# Altium PCB XPCAM-C_1V4.PCBDOC (part 2 of 2)
Units mil, origin at the board's own origin, x right, y up, seen from the top; angles counter-clockwise.
Board outline 1696.85 x 1007.87 mil, 6 copper layers (Top Layer, Internal Plane 1, Mid-Layer 1, Internal Plane 2, Mid-Layer 2, Bottom Layer); 49 components, 33 nets, 261 pads, 143 vias.
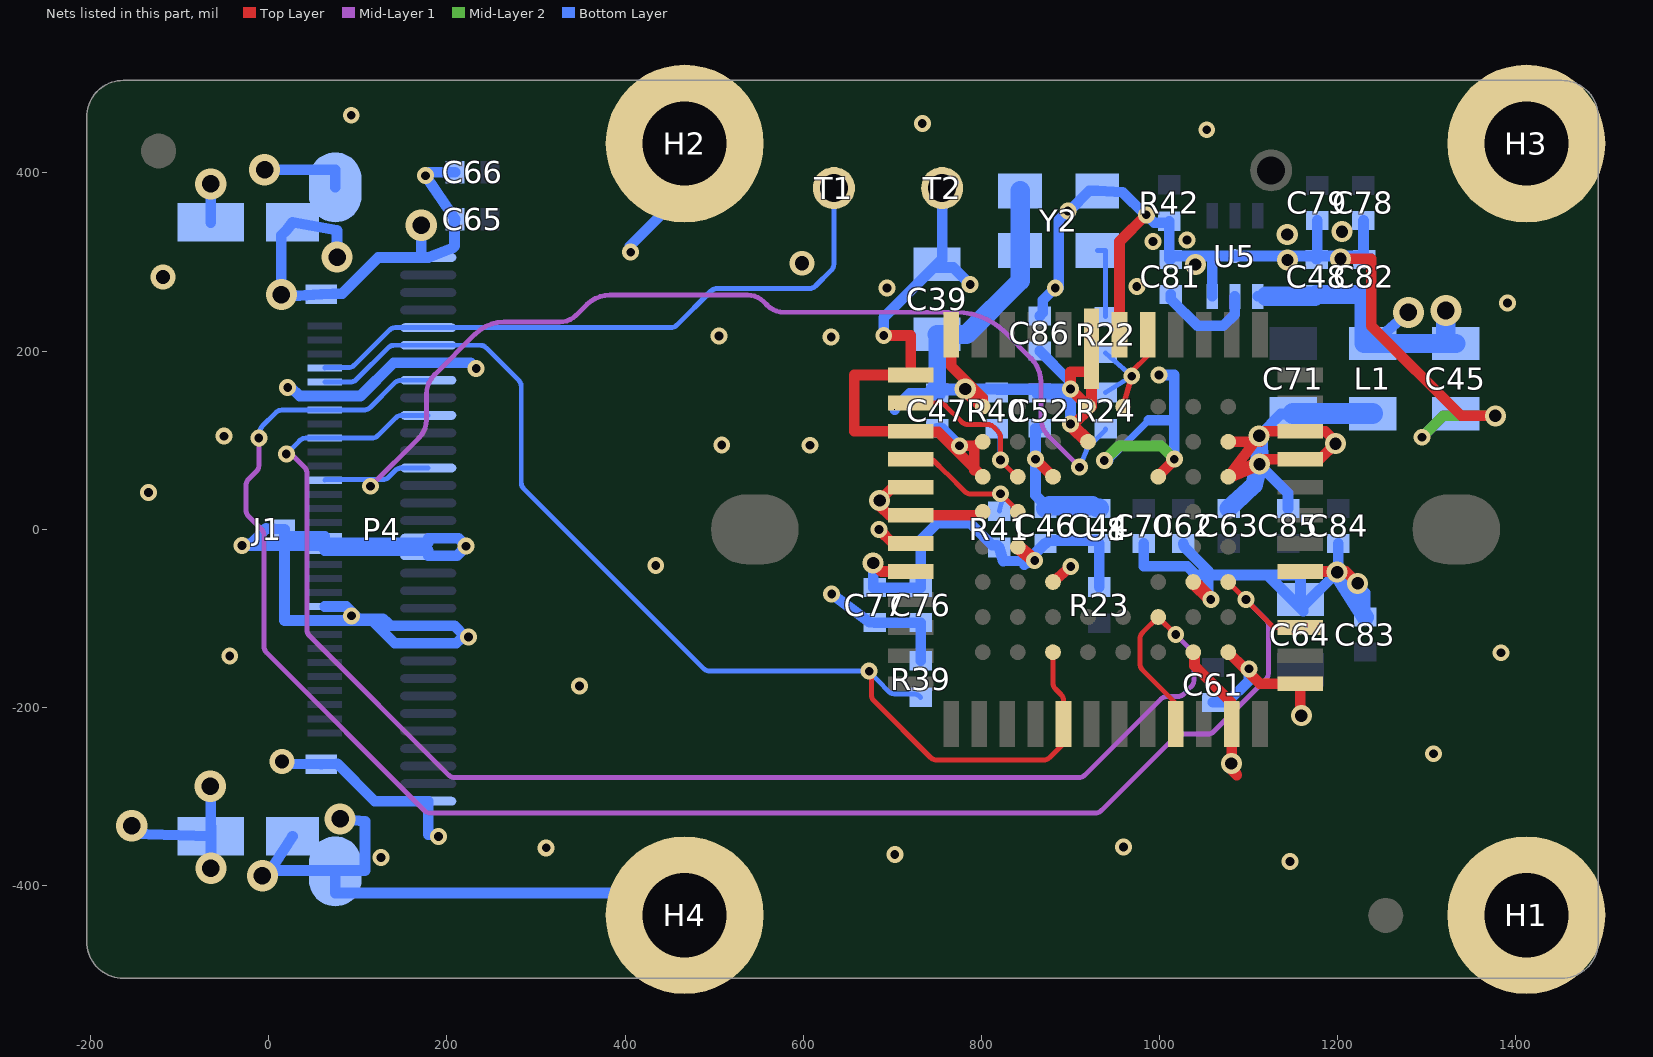
[diagram p6: the nets of this part, all layers, seen from the top]

## Via types
v1: diameter 19, hole 9.84, Top Layer to Bottom Layer, 101 vias
v2: diameter 23.62, hole 13.78, Top Layer to Bottom Layer, 22 vias
v3: diameter 35, hole 19.68, Top Layer to Bottom Layer, 12 vias
v4: diameter 16, hole 7.87, Top Layer to Bottom Layer, 3 vias
v5: diameter 27.95, hole 15.75, Top Layer to Bottom Layer, 3 vias
v6: diameter 20.47, hole 11.81, Top Layer to Bottom Layer, 1 vias
v7: diameter 0, hole 0, Top Layer to Bottom Layer, 1 vias

## Nets (pads, with @x,y where several pads share a name; then routed paths per layer and width w, separated by ;. In a path a pad name is that pad's centre, name@x,y a point inside that pad or via, vN(x,y) a via of type N, cw(c..) or ccw(c..) an arc to the next point about the centre after c; other vN are vias at no path point) (continued)
DGND: C39.1 C44.1 C45.1 C46.1 C47.1 C48.1 C52.1 C61.1 C65.1 C66.1 C76.2 C77.1 C78.1 C79.1 C81.1 C82.1 C86.1 H1.1 H2.1 H3.1 H4.1 J1.9 J1.10 J1.14 J1.15 J1.25 J1.33 J1.34 J1.35 J1.36 J1.37 J1.38 J1.39 P4.1 P4.7 P4.17 P4.18 P4.22 P4.23 P4.32 P4.33 P4.34 R39.2 R42.1 T2.1 U1.B1 U1.C1 U1.C3 U1.C6 U1.D1 U1.F3 U1.H7 U1.H8 U5.3 U5.7 U8.7 U8.9 U8.11 U8.12 U8.13 U8.29 U8.31 U8.48 Y2.2 | length 6791.9
  Top Layer w12: v1(685.13,-0.2) 700.67,-15.75 U8.13@720.88,-15.75 ; v1(690.42,217.58) 720.88,217.58 U8.7@720.88,173.23 657.21,173.23 657.21,110.24 U8.9@720.88,110.24 721.92,109.2 751.44,109.2 794.19,66.46 ; U8.11@720.88,47.24 719.08,45.45 698.86,45.45 v2(685.86,32.45) 686.66,31.66 686.66,25.69 696.6,15.75 U8.12@720.88,15.75 797.65,15.75 U1.D1@801.59,19.69 ; v1(775.45,93.79) 791.92,93.79 ; U1.C1@801.59,59.06 794.19,66.46 ; U1.B1@801.59,98.43 791.92,93.79 ; v1(860.64,78.74) U1.C3@880.33,59.06 ; U1.F3@880.33,-59.06 v1(900.31,-41.75) ; U8.48@955.13,218.5 955.13,323.05 v1(985.1,353.02) ; U1.C6@998.44,59.06 v1(1016.57,78.74) ; U1.H7@1037.81,-137.8 1039.26,-137.8 1039.26,-153.18 1080.48,-194.4 1080.48,-217.87 U8.29@1081.11,-218.5 1081.11,-270.06 1086.72,-275.66 v2(1080.5,-262.81) ; U1.H8@1077.18,-137.8 v1@1095.45,-156.06 ; v1(1100.42,-156.52) v1@1095.45,-156.06 ; v2(1159.16,-209.08) 1157.89,-209.08 U8.31@1157.89,-173.23 1112.61,-173.23 v1@1095.45,-156.06 ; v2(1203.2,303.7) 1237.61,303.7 1237.61,228.33 1338.49,127.45 v2(1376.89,127.45) ; 791.92,93.79 791.92,66.46 794.19,66.46
  Mid-Layer 2 w12: v1(938.02,77.19) 954.42,93.59 1001.72,93.59 v1(1016.57,78.74) ; v1(1294.45,103.39) 1318.52,127.45 v2(1376.89,127.45)
  Bottom Layer w7.87: v1@942.52,77.19 987.72,122.39
  Bottom Layer w12: v3(-153.68,-332.62) -153.68,-341.6 J1.36@-64.96,-344.49 ; v3(-65.44,-288.41) -64.96,-293.69 J1.36@-64.96,-344.49 ; J1.35@-64.96,344.49 v3(-64.96,387.69) ; v3(-64.79,-380.42) -64.79,-333.95 J1.36@-64.96,-344.49 ; v3(-4.6,403.56) 74.8,403.56 P4.33@74.8,383.86 ; v5(15.14,-260.68) 17.38,-262.91 J1.37@59.06,-263.78 77.03,-262.91 119.24,-305.12 P4.32@179.13,-305.12 179.13,-342.47 188.34,-342.47 v1(190.52,-344.65) ; v1(21.33,159.16) 24.73,159.16 34.9,149.74 ; J1.33@26.77,-344.49 6.79,-375.57 v3(-6.92,-388.81) -1.11,-382.99 108.15,-382.99 ; J1.10@62.99,-86.61 87.07,-86.61 v1@101.02,-100.57 ; J1.15@62.99,-7.87 17.72,-7.87 17.72,-102.36 ; J1.25@62.99,149.61 62.86,149.74 34.9,149.74 ; v3(76.77,305.55) 76.77,335.51 J1.34@26.77,344.49 19.8,335.51 14.29,330.01 v3(14.29,263.5) 14.48,261.28 19.93,261.28 J1.38@59.06,263.78 82.56,264.65 123.03,305.12 P4.1@171.32,305.12 ; v3(80.14,-325.04) 108.15,-327.73 108.15,-382.99 ; v3(171.32,341.3) P4.1@171.32,305.12 ; C66.1@209.27,400.96 180.14,400.96 v1(176.19,397.02) C65.1@209.27,348.23 208.58,347.54 208.58,318.04 206.36,315.82 P4.1@179.13,305.12 P4.1@171.32,305.12 ; v1(232.99,180.52) 226.5,187.01 P4.7@179.13,187.01 140.3,187.01 103.03,149.74 34.9,149.74 ; v1@405.28,317.89 481.09,393.7 H2.1@466.94,433.07 ; H4.1@466.94,-433.07 506.31,-387.59 502.58,-408.24 74.8,-408.24 P4.34@74.8,-383.86 80.9,-382.99 108.15,-382.99 ; v1(631.94,-72.55) 674.42,-104.2 C77.1@680.46,-104.78 C76.2@731.88,-104.78 R39.2@731.88,-147.63 ; v1(690.42,217.58) 690.42,237.73 C39.1@746.51,293.82 ; C47.1@750.25,113.51 755.72,113.51 v1(775.45,93.79) ; T2.1@755.95,383.03 755.95,302.56 755.25,302.56 C39.1@750.25,297.56 C39.1@746.51,293.82 ; v1(787.4,274.9) 768.48,293.82 C39.1@746.51,293.82 ; C52.1@865.38,113.51 860.64,113.51 v1(860.64,78.74) 860.64,38.19 876.48,22.34 C46.1@871.95,23.55 ; C86.1@865.38,239.56 869,243.18 869,257.16 v1(882.89,271.05) 886.93,271.05 886.93,347.3 v1(897.02,357.39) 898.67,357.39 921.2,379.92 Y2.2@930.12,379.92 958.49,378.48 983.95,353.02 v1(985.1,353.02) 993.88,344.24 1009.26,344.24 R42.1@1010.86,345.84 C81.1@1010.86,308.36 ; v1(938.02,77.19) v1@942.52,77.19 ; 987.72,122.39 1016.57,122.39 ; v1(999.3,173.25) 1016.57,173.25 1016.57,122.39 ; C81.1@1012.72,303.02 1010.86,303.02 C81.1@1010.86,308.36 ; v1(1016.57,78.74) 1016.57,122.39 ; U5.3@1059.05,261.49 1059.05,306.77 U5.7@1084.64,306.77 ; C61.1@1059.99,-194.21 1076.05,-194.21 1100.42,-169.84 v1(1100.42,-156.52) ; C48.1@1176.24,303.02 1177.06,303.85 C79.1@1177.06,346.63 ; C78.1@1228.82,346.63 1228.82,303.85 C82.1@1229.64,303.02 1225.9,306.77 U5.7@1084.64,306.77 ; v1(1294.45,103.39) 1318.66,127.59 1330.03,127.59 C45.1@1332.36,129.92 ; 17.72,-102.36 J1.9@62.99,-102.36 130.08,-102.36 ; 17.72,-102.36 J1.39@17.72,0 17.67,0 -2.87,0.87 -18.72,-14.98 v1(-29.99,-18.14) 59.16,-18.14 J1.14@62.99,-23.62 ; J1.14@62.99,-23.62 62.99,-15.01 179.13,-15.01 P4.17@179.13,-9.84 213.08,-9.84 221.62,-18.39 v1(221.62,-18.88) 221.62,-19.25 211.35,-29.53 P4.18@179.13,-29.53 179.13,-23.62 J1.14@62.99,-23.62 ; v1@101.02,-100.57 128.28,-100.57 130.08,-102.36 ; v1@101.02,-100.57 101.95,-101.49 115.13,-101.49 141.58,-127.95 P4.23@179.13,-127.95 210.65,-127.95 215.85,-122.74 223.01,-122.74 223.04,-120.79 v1(224.39,-120.81) 222.39,-118.81 220.74,-120.47 208.54,-108.27 P4.22@179.13,-108.27 137.21,-108.27 132.56,-103.62 131.33,-103.62 130.08,-102.36 ; C81.1@1010.86,308.36 1012.46,306.77 U5.7@1084.64,306.77
  Bottom Layer w21.65: C46.1@871.95,23.55 876.48,26.34 924.58,26.34 C44.1@932.28,23.55
  other v1: 1146.48,-372.76 125.97,-368.28 702.81,-364.95 311.5,-357.48 959.51,-356.59 1307.59,-251.84 348.8,-175.96 -43.65,-142.14 1383.15,-138.52 92.91,-97.05 434.51,-40.44 -134.95,41.51 607.63,94.45 508.61,94.69 -50.11,104.61 631.37,216.04 505.55,216.93 1390.48,253.94 694.03,270.86 974.49,272.55 406.35,311.13 992.54,323.2 1030.71,324.79 1052.96,448.53 733.7,455.51 92.73,464.82
  other v2: 1040.19,297.39 1143.66,302.34 1143.32,330.92 1204.72,334.14
  other v5: -118.36,283.35 598.81,298.67
EXPOSURE: J1.26 P4.6 R39.1 U1.H3 U8.23 | length 1335.1
  Top Layer w5.5: v1(674.05,-159.2) v1@675.32,-160.11 ; U1.H3@880.33,-137.8 880.33,-172.37 ccw(c889.95,-172.37) 883.15,-179.17 889.32,-185.34 cw(c882.51,-192.15) 892.14,-192.15 U8.23@892.14,-218.5 U8.23@892.14,-236.63 ; v1@675.32,-160.11 cw(c669.7,-167.92) v1@676.51,-161.12 ; v1@675.32,-160.11 cw(c669.7,-167.92) v1@676.51,-161.12 ; v1@676.51,-161.12 676.65,-161.26 676.65,-185.78 ; 676.65,-185.78 ccw(c686.28,-185.78) 679.47,-192.58 ; 676.65,-185.78 ccw(c686.28,-185.78) 679.47,-192.58 ; 679.47,-192.58 742.91,-256.01 ; 742.91,-256.02 ccw(c749.71,-249.21) 749.71,-258.83 ; 742.91,-256.02 ccw(c749.71,-249.21) 749.71,-258.83 ; 749.71,-258.83 869.94,-258.83 ; 869.94,-258.83 ccw(c869.94,-249.21) 876.74,-256.02 ; 869.94,-258.83 ccw(c869.94,-249.21) 876.74,-256.02 ; 876.74,-256.01 U8.23@889.32,-243.44 ; U8.23@889.32,-243.44 ccw(c882.51,-236.63) U8.23@892.14,-236.63 ; U8.23@889.32,-243.44 ccw(c882.51,-236.63) U8.23@892.14,-236.63
  Bottom Layer w5.5: J1.26@62.99,165.35 63.7,165.37 cw(c63.95,155.75) 63.95,165.38 91.69,165.38 ccw(c91.69,175) 98.5,168.19 134.18,203.88 cw(c140.99,197.07) 140.99,206.7 P4.6@179.13,206.69 237.26,206.7 cw(c237.26,197.07) 244.06,203.88 280.7,167.25 cw(c273.89,160.44) 283.51,160.44 283.51,52.51 ccw(c293.14,52.51) 286.33,45.7 488.41,-156.38 ccw(c495.22,-149.57) 495.22,-159.2 v1(674.05,-159.2) 695.43,-181.68 ccw(c702.41,-175.04) 702.41,-184.67 723.99,-184.67 cw(c723.99,-194.29) 730.8,-187.49 R39.1@731.88,-188.58
LEDOUT0: J1.22 P4.10 U1.G6 U8.27 | length 1728.3
  Top Layer w5.5: U1.G6@998.44,-98.43 980.75,-116.11 ccw(c987.56,-122.91) 977.94,-122.91 977.94,-150.87 ccw(c987.56,-150.87) 980.75,-157.68 1015.3,-192.23 cw(c1008.5,-199.04) 1018.12,-199.04 U8.27@1018.12,-218.5
  Top Layer w6: U1.G6@998.44,-98.43 v1(1018.12,-118.11)
  Mid-Layer 1 w5.5: v1(19.83,84.56) 21.43,84.56 cw(c21.43,74.94) 28.24,81.74 40.31,69.67 cw(c33.5,62.87) 43.12,62.87 43.12,-112.92 ccw(c52.75,-112.92) 45.94,-119.73 202.1,-275.88 ccw(c208.9,-269.08) 208.9,-278.7 909.17,-278.7 ccw(c909.17,-269.08) 915.97,-275.88 1001.36,-190.5 cw(c1008.16,-197.31) 1008.16,-187.68 1020.28,-187.68 ccw(c1020.28,-178.06) 1027.09,-184.86 1035.67,-176.28 ccw(c1028.87,-169.47) 1038.49,-169.47 1038.49,-142.47 ccw(c1028.87,-142.47) 1035.68,-135.66 v1(1018.12,-118.11)
  Bottom Layer w5.5: v1(19.83,84.56) 34.81,99.54 cw(c41.62,92.74) 41.62,102.36 J1.22@62.99,102.36 115.78,102.36 ccw(c115.78,111.99) 122.58,105.18 142.54,125.14 cw(c149.34,118.33) 149.34,127.95 P4.10@179.13,127.95
MCLK27M: R22.1 R24.1 U1.A5 U8.47 | length 163.2
  Top Layer w5.5: v1(968.78,171.97) 968.78,177.16 986.63,195.01 U8.47@986.63,218.5
  Top Layer w6: U1.A5@959.07,137.8 v1(968.78,171.97)
  Bottom Layer w5.5: R24.1@939.38,153.67 v1(968.78,171.97) R22.1@939.38,197.74
MCLK27M': J1.19 P4.13 R24.2 | length 1492.4
  Mid-Layer 1 w5.5: v1(114.36,48.39) 168.98,103.01 ; v1(910.19,69.82) 875.41,104.61 ; 168.98,103.01 ccw(c149.38,122.61) 177.1,122.61 ; 168.98,103.01 ccw(c149.38,122.61) 177.1,122.61 ; 177.1,122.61 177.1,151.36 ; 177.1,151.36 cw(c208.64,151.36) 186.34,173.66 ; 177.1,151.36 cw(c208.64,151.36) 186.34,173.66 ; 186.34,173.66 232.12,219.44 ; 232.12,219.44 cw(c264.03,187.53) 264.03,232.66 ; 232.12,219.44 cw(c264.03,187.53) 264.03,232.66 ; 264.03,232.66 326.57,232.66 ; 326.57,232.66 ccw(c326.57,259.17) 345.32,240.42 ; 326.57,232.66 ccw(c326.57,259.17) 345.32,240.42 ; 345.32,240.42 357.1,252.2 ; 357.1,252.2 cw(c383.13,226.18) 383.13,262.98 ; 357.1,252.2 cw(c383.13,226.18) 383.13,262.98 ; 383.13,262.98 537.67,262.98 ; 537.67,262.98 cw(c537.67,237.5) 555.68,255.52 ; 537.67,262.98 cw(c537.67,237.5) 555.68,255.52 ; 555.68,255.52 559.95,251.25 ; 559.95,251.25 ccw(c578.3,269.59) 578.3,243.65 ; 559.95,251.25 ccw(c578.3,269.59) 578.3,243.65 ; 578.3,243.65 771.66,243.65 ; 771.66,243.65 cw(c771.66,165.16) 827.16,220.66 ; 771.66,243.65 cw(c771.66,165.16) 827.16,220.66 ; 827.16,220.66 855.58,192.25 ; 855.58,192.25 cw(c828.08,164.75) 866.97,164.75 ; 855.58,192.25 cw(c828.08,164.75) 866.97,164.75 ; 866.97,124.99 ccw(c895.78,124.99) 875.41,104.61 ; 866.97,124.99 ccw(c895.78,124.99) 875.41,104.61 ; 866.97,124.99 866.97,164.75
  Bottom Layer w5.5: J1.19@62.99,55.12 63.86,55.99 v1@114.36,55.99 ; v1(114.36,48.39) v1@114.36,55.99 ; P4.13@179.13,68.9 149.09,68.9 ccw(c149.09,59.27) 142.28,66.08 135.01,58.8 cw(c128.2,65.61) 128.2,55.99 v1@114.36,55.99 ; v1(910.19,69.82) 918.07,89.39 ; R24.2@939.38,112.73 939.38,111.79 920.19,92.6 ; 918.07,89.39 cw(c927,85.79) 920.2,92.6 ; 918.07,89.39 cw(c927,85.79) 920.2,92.6
NETC81_2: C81.2 U5.2 | length 115.3
  Bottom Layer w11.81: C81.2@1012.72,263.65 1012.76,263.61 1012.76,258.14 1042.57,228.33 1071.68,228.33 1084.64,241.29 U5.2@1084.64,261.49
NETR22_2: R22.2 Y2.3 | length 83.6
  Bottom Layer w5.5: Y2.3@930.12,312.99 939.38,312.99 R22.2@939.38,238.68
NETR40_1: R40.1 U1.C2 U8.8 | length 206.6
  Top Layer w5.5: U8.8@720.88,141.73 752.71,141.73 cw(c752.71,132.11) 759.52,138.91 777.82,120.61 ccw(c784.63,127.42) 784.63,117.79 806.83,117.79 cw(c806.83,108.17) 813.63,114.97 818.59,110.02 cw(c811.78,103.21) 821.41,103.21 821.41,80.04 v1(821.41,77.83) 821.13,77.55 839.63,59.06 U1.C2@840.96,59.06
  Bottom Layer w5.5: R40.1@817.28,112.73 820.98,105.33 820.98,77.83 v1(821.41,77.83)
NETR41_1: R41.1 U1.D2 U8.10 | length 167.4
  Top Layer w5.5: U8.10@720.88,78.74 744.84,78.74 745.73,77.86 760.58,63 760.91,63 781.38,42.53 ccw(c788.19,49.33) 788.19,39.71 821.18,39.71 v1(821.43,39.96) 821.69,39.96 822.21,39.44 840.96,20.69 U1.D2@840.96,19.69
  Bottom Layer w5.5: R41.1@820.15,20.52 824.68,37 823.76,37.76 822.71,40.38 v1(821.43,39.96)
STANDBY: J1.24 P4.8 U1.F8 U8.33 | length 1934.8
  Top Layer w5.5: U1.F8@1077.18,-59.06 v1(1096.86,-78.74) 1127.93,-109.81 1127.93,-110.24 U8.33@1157.89,-110.24
  Mid-Layer 1 w5.5: v1(-11,102.41) -11,71.74 cw(c-20.62,71.74) -13.82,64.94 -22.56,56.2 ccw(c-15.75,49.39) -25.38,49.39 -25.38,21.57 ccw(c-15.75,21.57) -22.56,14.77 -7.96,0.17 cw(c-14.76,-6.64) -5.14,-6.64 -5.14,-131.64 ccw(c4.49,-131.64) -2.32,-138.45 174.95,-315.72 ccw(c181.76,-308.91) 181.76,-318.54 927.64,-318.54 ccw(c927.64,-308.91) 934.45,-315.72 1017.59,-232.58 cw(c1024.39,-239.39) 1024.39,-229.76 1054.13,-229.76 ccw(c1054.13,-220.14) 1060.94,-226.94 1119.31,-168.57 ccw(c1112.5,-161.76) 1122.13,-161.76 1122.13,-107.99 ccw(c1112.5,-107.99) 1119.31,-101.18 v1(1096.86,-78.74)
  Bottom Layer w5.5: v1(-11,102.41) -9.65,103.76 -9.65,109.38 cw(c-0.02,109.38) -6.83,116.18 8.03,131.04 cw(c14.84,124.23) 14.84,133.86 J1.24@62.99,133.86 106.94,133.86 ccw(c106.94,143.48) 113.74,136.68 141.57,164.51 cw(c148.38,157.7) 148.38,167.32 P4.8@179.13,167.33
TEST1: J1.27 P4.5 T1.1 | length 704.9
  Bottom Layer w5.5: J1.27@62.99,181.1 63.42,181.53 89.44,181.53 ccw(c89.44,191.15) 96.24,184.35 125.34,213.45 135.45,223.56 cw(c142.26,216.76) 142.26,226.38 P4.5@179.13,226.38 451.45,226.38 ccw(c451.45,236.01) 458.26,229.2 496.54,267.48 cw(c503.34,260.67) 503.34,270.3 607.06,270.3 ccw(c607.06,279.92) 613.87,273.12 631.63,290.87 ccw(c624.82,297.68) 634.44,297.68 T1.1@634.44,383.03
VAA3.3V: C62.2 C63.2 C64.2 C70.2 C71.2 C83.2 C84.2 C85.2 L1.2 U1.B8 U1.C8 U1.F7 U8.35 U8.39 U8.40 | length 1370.3
  Top Layer w12: U1.C8@1077.18,59.06 v2(1111.75,104.98) ; U1.B8@1077.18,98.43 v2@1113.33,98.43 ; v2@1103.82,70.3 v2(1112.17,73.14) ; v2@1113.33,79.04 1112.17,77.88 v2(1112.17,73.14) ; v2@1113.33,109.73 1113.84,110.24 U8.40@1157.89,110.24 1185.93,110.24 1197.35,98.81 v2(1197.35,96.2) 1179.89,78.74 U8.39@1157.89,78.74 1117.77,78.74 v2(1112.17,73.14) ; U8.35@1157.89,-47.24 v2@1196.71,-47.24 ; v2(1199.39,-47.99) v2@1196.71,-47.24 ; v2(1222.41,-60.55) 1209.11,-47.24 v2@1196.71,-47.24
  Top Layer w15.75: U1.F7@1037.81,-59.06 v1(1057.49,-78.74) ; U1.C8@1077.18,59.06 v2@1103.82,70.3
  Bottom Layer w12: C70.2@982.27,-15.86 982.27,-41.52 1031.01,-41.52 1040.74,-51.25 1054.45,-51.25 ; C62.2@1026.67,-15.86 1027.61,-19.69 1054.45,-46.52 1054.45,-51.25 ; v1(1057.49,-78.74) 1054.45,-75.7 1054.45,-51.25 ; v2(1111.75,104.98) 1136.14,129.38 1154.07,129.38 C71.2@1150.01,129.92 ; v2(1112.17,73.14) 1112.17,72.52 1144.2,40.49 C85.2@1144.2,23.51 ; C84.2@1200.69,-15.86 1200.69,-46.69 v2(1199.39,-47.99) 1161.3,-86.08 C64.2@1161.3,-91.1 ; v2(1222.41,-60.55) 1222.41,-62.58 1230.87,-71.04 C83.2@1230.87,-98.43 ; 1054.45,-51.25 1120.89,-51.25 ; 1120.89,-51.25 1121.45,-51.25 ; 1120.89,-51.25 1161.3,-91.66 C64.2@1158.14,-78.74 ; 1121.45,-51.25 C64.2@1161.3,-91.1 ; 1121.45,-51.25 1158.14,-51.25 C64.2@1158.14,-78.74 ; C64.2@1158.14,-78.74 1161.3,-92.03 C64.2@1161.3,-91.1
  Bottom Layer w19.68: v2(1111.75,104.98) v2(1112.17,73.14) ; v2(1199.39,-47.99) C83.2@1230.87,-98.43
  Bottom Layer w20: C63.2@1077.5,23.51 1083.79,29.2 1105.88,49.68 v2(1112.17,73.14)
  Bottom Layer w23.62: C71.2@1150.01,129.92 L1.2@1239.21,129.92
VDD3.3V: C39.2 C44.2 C45.2 C46.2 C47.2 C48.2 C52.2 C76.1 C77.2 C82.2 C86.2 L1.1 R23.2 R40.2 R41.2 U1.A1 U1.A4 U1.B4 U1.E2 U5.1 U8.1 U8.6 U8.14 Y2.1 Y2.4 | length 1975.6
  Top Layer w12: v2(678.55,-37.87) 687.88,-47.2 U8.14@720.88,-47.24 U8.14@720.88,-47.24 ; U8.6@766.15,218.5 766.15,183.16 801.48,147.83 801.48,137.9 U1.A1@801.59,137.8 ; v1@901.87,116.25 923.63,138.02 U8.1@923.63,176.94 ; U1.A4@919.7,137.8 v1(900.01,157.48) 900.01,176.94 U8.1@923.63,176.94 ; U8.1@923.63,202.76 U8.1@923.63,176.94
  Top Layer w15.75: v2(781.9,157.48) U1.A1@801.59,137.8 ; U1.E2@840.96,-19.69 v1(859.85,-34.85) ; v1(900.01,118.11) 901.87,116.25 U1.B4@919.7,98.43
  Bottom Layer w5.5: C47.2@750.25,152.88 777.31,152.89 v2(781.9,157.48) ; R40.2@817.28,153.67 860.9,153.67 C52.2@865.38,152.88 865.38,157.48 v1@898.62,157.48 ; v1@898.62,157.48 v1(900.01,157.48) 899.45,158.31 v1@898.62,157.48
  Bottom Layer w12: v2(678.55,-37.87) 678.55,-65.41 C77.2@680.46,-65.42 C76.1@731.88,-65.42 731.88,-11.91 750.58,6.78 787.59,6.78 812.17,-17.79 817.52,-17.79 R41.2@820.15,-20.42 824.68,-35.96 v1(859.85,-34.85) 847.96,-39.37 871.51,-15.82 C46.2@871.95,-15.82 876.48,-12.53 928.61,-12.48 C44.2@932.28,-15.82 R23.2@932.28,-64.63 ; v7(702.63,134.63) 702.63,135.32 719.71,152.4 C47.2@750.25,152.88 743.28,156.59 743.28,157.48 v2(781.9,157.48) 898.62,157.48 898.62,166.95 C86.2@865.38,200.19 ; C52.2@865.38,152.88 862.87,151.7 900.01,151.7 v1(900.01,118.11) ; U5.1@1110.24,261.49 1119.76,261.49 ; L1.1@1239.21,208.66 v3(1279.32,243.44)
  Bottom Layer w19.68: C47.2@750.25,152.88 C39.2@750.25,218.82
  Bottom Layer w21.65: C39.2@750.25,218.82 783.17,218.82 843.51,279.16 Y2.4@843.51,312.99 Y2.1@843.51,379.92 ; 1119.76,261.49 1174.07,261.49 C48.2@1176.24,263.65 C82.2@1229.64,263.65 1229.64,208.66 L1.1@1239.21,208.66 C45.2@1332.36,208.66 1321.36,208.66 v3(1321.36,245.65)
pads on no net: J1.31 J1.32 LM1.1 LM1.2 M1.1 M2.1 U1.A2 U1.A3 U1.A6 U1.B2 U1.B3 U1.B6 U1.D7 U1.D8 U1.E7 U1.E8 U1.G3 U1.G5 U1.H5 U5.5 U8.2 U8.3 U8.4 U8.5 U8.22 U8.26 U8.36 U8.37 U8.44 U8.45

## Polygon pours and split planes (outlines as drawn)
VDD3.3V on Bottom Layer "Bottom Layer-VDD3.3V" (solid, remove dead copper, pour order 1000): 950.93,-0.62 797.63,-0.62 778.4,18.61 723.91,18.61 663.29,-42.01 663.29,-88.22 950.93,-88.22
AGND on Bottom Layer "Bottom Layer-AGND" (solid, remove dead copper, pour order 1001): 1289.87,91.77 1289.87,-183.72 1115.44,-183.72 1115.44,-93.15 950.23,-93.15 950.23,47.74 994.26,91.77 1066.8,91.77 1066.8,20.07 1139.76,20.07 1211.46,91.77
VAA3.3V on Bottom Layer "Bottom Layer-VAA3.3V" (solid, remove dead copper, pour order 1002): 956.88,1.05 1034.87,1.05 1059.97,-24.06 1154.52,-24.06 1155.15,-23.43 1222.41,-23.43 1222.41,-114.87 1064.25,-114.87 1011.1,-61.72 956.88,-61.72
5V0 on Bottom Layer "Bottom Layer-5V0" (solid, remove dead copper, pour order 1003): 1251.17,367.23 1093.06,367.23 1093.06,450.56 1251.17,450.56
VDD3.3V on Bottom Layer "Bottom Layer-VDD3.3V 1" (solid, remove dead copper, pour order 1004): 916.81,109.81 708.84,109.81 708.84,249.86 827.92,249.86 859.37,218.41 916.81,218.41
VAA3.3V on Bottom Layer "Bottom Layer-VAA3.3V 1" (solid, remove dead copper, pour order 1005): 1283.44,170.23 1076.3,170.23 1076.3,13.41 1163.51,13.41 1163.51,39.4 1216.35,92.24 1283.44,92.24
VDD3.3V on Bottom Layer "Bottom Layer-VDD3.3V 2" (solid, remove dead copper, pour order 1006): 1100.54,287.64 1100.54,188.29 1361.74,188.29 1361.74,287.64
5V0 on Bottom Layer "Bottom Layer-5V0 1" (solid, remove dead copper, pour order 1007): 227.89,403.29 227.89,289.94 138.89,289.94 87.08,238.12 37.4,238.12 37.4,187.91 98.3,187.91 142.63,232.25 291.01,232.25 291.01,403.29
DGND on Bottom Layer "Bottom Layer-DGND" (solid, remove dead copper, pour order 1008): 1467.61,480.7 -172.39,480.7 -172.39,-479.08 1467.61,-479.08
VDD3.3V on Top Layer "Top Layer-VDD3.3V" (solid, remove dead copper, pour order 1009): 926.44,99.09 926.44,245.93 749.1,245.93 749.1,131.62 831.88,131.62 831.88,99.09
DGND on Top Layer "Top Layer-DGND" (solid, remove dead copper, pour order 1010): 1473.76,-484.52 1473.76,483.65 -177.85,483.65 -177.85,-484.52
AGND on Top Layer "Top Layer-AGND" (solid, remove dead copper, pour order 1011): 1084.13,258.59 1084.13,121.88 953.86,-8.39 953.86,-104.83 1174.41,-104.83 1174.41,-187.51 1360.81,-187.51 1360.81,59.97 1246.22,59.97 1246.22,187.95 1175.58,258.59
DGND on Mid-Layer 2 "Mid-Layer 2-DGND" (solid, remove dead copper, pour order 1012): 1466.25,6.15 1284.03,6.15 1284.03,260.9 1035.98,260.9 1035.98,58.78 941.04,-36.15 941.04,-131.09 1117.13,-131.09 1117.13,-187.74 1292.94,-187.74 1292.94,3.66 1465.63,3.66 1465.63,-480.2 -172.15,-480.2 -172.15,484.46 1466.25,484.46
AGND on Mid-Layer 2 "Mid-Layer 2-AGND" (solid, remove dead copper, pour order 1013): 1292.22,247.2 1040.24,247.2 1040.24,65.75 960.65,-13.83 960.65,-120.35 1124.85,-120.35 1124.85,-187.63 1292.22,-187.63
DGND on Internal Plane 1 (split plane): 1461.99,502.87 1472.04,498.71 1480.68,492.08 1487.3,483.45 1491.47,473.39 1492.89,462.6 1492.53,-462.6 1492.89,-462.6 1491.47,-473.39 1487.3,-483.45 1480.68,-492.08 1472.04,-498.71 1461.99,-502.87 1451.19,-504.29 -162.98,-503.94 -162.98,-504.29 -173.77,-502.87 -183.83,-498.71 -192.46,-492.08 -199.09,-483.45 -203.25,-473.39 -204.67,-462.6 -204.32,462.6 -204.67,462.6 -203.25,473.39 -199.09,483.45 -192.46,492.08 -183.83,498.71 -173.77,502.87 -162.98,504.29 -162.96,503.94 1451.19,503.94 1451.19,504.29
DGND on Internal Plane 1 (split plane): 1463.6,11.32 1292.3,11.32 1292.3,249.53 1291.91,251.48 1291.42,252.22 1291.42,261.06 1291.03,262.98 1289.95,264.61 1288.32,265.69 1286.4,266.08 1038.34,266.08 1036.42,265.69 1034.79,264.61 1033.71,262.98 1033.33,261.06 1033.33,61.02 1016.54,44.23 943.32,44.23 943.32,-28.99 939.86,-32.45 938.77,-34.08 938.39,-36 938.39,-130.93 938.77,-132.85 939.86,-134.48 941.49,-135.57 943.41,-135.95 1114.48,-135.95 1114.48,-187.59 1114.86,-189.51 1115.95,-191.13 1117.58,-192.22 1119.5,-192.6 1295.3,-192.6 1297.22,-192.22 1298.85,-191.13 1299.94,-189.51 1300.32,-187.59 1300.32,-1.2 1462.98,-1.2 1462.98,-475.03 -164.76,-475.03 -164.76,479.6 1463.6,479.6
AGND on Internal Plane 1 (split plane): 1281.38,6.31 1281.76,4.39 1282.11,3.87 1282.11,-178.62 1256.37,-178.62 1254.41,-179.01 1254.2,-179.15 1137.15,-179.15 1137.15,-121.18 1136.76,-119.23 1135.66,-117.58 1134,-116.47 1132.05,-116.08 968.1,-116.08 968.1,-51.03 1066.71,-51.03 1066.71,44.23 1036.21,44.23 1042.4,50.42 1043.51,52.07 1043.89,54.02 1043.89,244.43 1281.38,244.43
no net on Internal Plane 1 (split plane): 957.91,-121.18 958.29,-123.13 959.4,-124.79 961.05,-125.89 961.17,-125.91 948.43,-125.91 948.43,-51.03 957.91,-51.03
no net on Internal Plane 1 (split plane): 1281.38,254.63 1043.36,254.63 1043.36,256.04 1281.38,256.04
no net on Internal Plane 1 (split plane): 1126.96,-182.57 1124.51,-182.57 1124.51,-130.93 1124.13,-129.01 1123.05,-127.38 1121.42,-126.3 1121.33,-126.28 1126.96,-126.28
VDD3.3V on Internal Plane 2 (split plane): 1402.73,141.14 999.42,141.14 997.47,140.75 995.82,139.65 994.71,138 994.32,136.04 994.32,-445.48 543.03,-445.48 543.7,-440.99 544.07,-433.38 543.7,-425.78 542.58,-418.25 540.73,-410.86 538.16,-403.69 534.91,-396.81 530.99,-390.28 526.46,-384.16 521.35,-378.52 515.7,-373.41 509.59,-368.87 503.06,-364.96 496.17,-361.7 489.01,-359.14 481.62,-357.29 474.09,-356.17 466.48,-355.8 458.88,-356.17 451.35,-357.29 443.96,-359.14 436.79,-361.7 429.91,-364.96 423.38,-368.87 417.26,-373.41 411.62,-378.52 406.51,-384.16 401.97,-390.28 398.06,-396.81 394.8,-403.69 392.24,-410.86 390.39,-418.25 389.27,-425.78 388.9,-433.38 389.27,-440.99 389.94,-445.48 -129.16,-445.48 -129.16,147.25 729.02,147.25 730.97,147.64 732.63,148.74 851.73,267.85 1402.73,267.85
5V0 on Internal Plane 2 (split plane): 1335.43,448.38 1334.31,440.85 1333.94,433.25 1334.31,425.64 1335.43,418.11 1337.28,410.73 1339.85,403.56 1343.1,396.67 1347.02,390.14 1351.55,384.03 1356.66,378.39 1362.31,373.27 1368.42,368.74 1374.95,364.82 1381.83,361.57 1389,359 1396.39,357.15 1403.92,356.04 1405.7,355.95 1405.7,286.98 846.26,286.98 844.31,286.59 842.66,285.48 725.58,168.41 -131,168.41 -131,453.72 392.41,453.72 391.07,448.38 389.96,440.85 389.58,433.25 389.96,425.64 391.07,418.11 392.92,410.73 395.49,403.56 398.74,396.67 402.66,390.14 407.19,384.03 412.31,378.39 417.95,373.27 424.06,368.74 430.59,364.82 437.48,361.57 444.65,359 452.03,357.15 459.56,356.04 467.17,355.66 474.77,356.04 482.3,357.15 489.69,359 496.86,361.57 503.74,364.82 510.27,368.74 516.39,373.27 522.03,378.39 527.14,384.03 531.68,390.14 535.59,396.67 538.85,403.56 541.41,410.73 543.26,418.11 544.38,425.64 544.75,433.25 544.38,440.85 543.26,448.38 541.93,453.72 1336.77,453.72
VAA3.3V on Internal Plane 2 (split plane): 1408.6,-355.03 1403.78,-355.26 1396.25,-356.38 1388.86,-358.23 1381.69,-360.8 1374.81,-364.05 1368.28,-367.97 1362.16,-372.5 1356.52,-377.62 1351.41,-383.26 1346.87,-389.37 1342.96,-395.9 1339.7,-402.79 1337.14,-409.95 1335.29,-417.34 1334.17,-424.87 1333.8,-432.48 1334.17,-440.08 1334.7,-443.65 1016.26,-443.65 1016.26,119.2 1408.6,119.2
no net on Internal Plane 2 (split plane): -162.96,503.94 435.38,503.94 430.59,501.67 424.06,497.76 417.95,493.22 412.31,488.11 407.19,482.47 402.66,476.35 398.74,469.82 395.95,463.92 -136.1,463.92 -138.05,463.53 -139.7,462.42 -140.81,460.77 -141.19,458.82 -141.19,163.31 -140.81,161.36 -139.7,159.71 -138.05,158.6 -136.1,158.21 727.68,158.21 726.91,157.45 -134.26,157.45 -136.21,157.06 -137.86,155.95 -138.97,154.3 -139.36,152.35 -139.36,-450.58 -138.97,-452.53 -137.86,-454.19 -136.21,-455.29 -134.26,-455.68 392.18,-455.68 392.24,-455.91 394.8,-463.07 398.06,-469.96 401.97,-476.49 406.51,-482.6 411.62,-488.24 417.26,-493.36 423.38,-497.89 429.91,-501.81 434.69,-504.07 -162.98,-503.94 -162.98,-504.29 -173.77,-502.87 -183.83,-498.71 -192.46,-492.08 -199.09,-483.45 -203.25,-473.39 -204.67,-462.6 -204.32,462.6 -204.67,462.6 -203.25,473.39 -199.09,483.45 -192.46,492.08 -183.83,498.71 -173.77,502.87 -162.98,504.29
no net on Internal Plane 2 (split plane): 1461.99,502.87 1472.04,498.71 1480.68,492.08 1487.3,483.45 1491.47,473.39 1492.89,462.6 1492.53,-462.6 1492.89,-462.6 1491.47,-473.39 1487.3,-483.45 1480.68,-492.08 1472.04,-498.71 1461.99,-502.87 1451.19,-504.29 1440.7,-504.29 1441.07,-504.16 1447.96,-500.9 1454.49,-496.99 1460.6,-492.45 1466.25,-487.34 1471.36,-481.7 1475.89,-475.58 1479.81,-469.05 1483.06,-462.17 1485.63,-455 1487.48,-447.61 1488.6,-440.08 1488.97,-432.48 1488.6,-424.87 1487.48,-417.34 1485.63,-409.95 1483.06,-402.79 1479.81,-395.9 1475.89,-389.37 1471.36,-383.26 1466.25,-377.62 1460.6,-372.5 1454.49,-367.97 1447.96,-364.05 1441.07,-360.8 1433.91,-358.23 1426.52,-356.38 1418.99,-355.26 1418.8,-355.26 1418.8,124.29 1418.41,126.24 1417.31,127.9 1415.65,129 1413.7,129.39 1011.16,129.39 1009.21,129 1007.56,127.9 1006.45,126.24 1006.06,124.29 1006.06,-448.74 1006.45,-450.69 1007.56,-452.35 1009.21,-453.45 1011.16,-453.84 1336.85,-453.84 1337.14,-455 1339.7,-462.17 1342.96,-469.05 1346.87,-475.58 1351.41,-481.7 1356.52,-487.34 1362.16,-492.45 1368.28,-496.99 1374.81,-500.9 1381.69,-504.16 1382.04,-504.28 498.25,-504.08 503.06,-501.81 509.59,-497.89 515.7,-493.36 521.35,-488.24 526.46,-482.6 530.99,-476.49 534.91,-469.96 538.16,-463.07 540.73,-455.91 540.79,-455.68 999.42,-455.68 1001.37,-455.29 1003.03,-454.19 1004.13,-452.53 1004.52,-450.58 1004.52,130.95 1407.83,130.95 1409.78,131.33 1411.44,132.44 1412.54,134.09 1412.93,136.04 1412.93,272.95 1412.54,274.9 1411.44,276.55 1411.02,276.83 1412.75,277.17 1414.41,278.27 1415.51,279.93 1415.9,281.88 1415.9,355.88 1419.13,356.04 1426.66,357.15 1434.05,359 1441.22,361.57 1448.1,364.82 1454.63,368.74 1460.74,373.27 1466.39,378.39 1471.5,384.03 1476.04,390.14 1479.95,396.67 1483.2,403.56 1485.77,410.73 1487.62,418.11 1488.74,425.64 1489.11,433.25 1488.74,440.85 1487.62,448.38 1485.77,455.77 1483.2,462.94 1479.95,469.82 1476.04,476.35 1471.5,482.47 1466.39,488.11 1460.74,493.22 1454.63,497.76 1448.1,501.67 1443.31,503.94 1451.19,503.94 1451.19,504.29
no net on Internal Plane 2 (split plane): 1374.95,501.67 1368.42,497.76 1362.31,493.22 1356.66,488.11 1351.55,482.47 1347.02,476.35 1343.1,469.82 1340.31,463.92 538.38,463.92 535.59,469.82 531.68,476.35 527.14,482.47 522.03,488.11 516.39,493.22 510.27,497.76 503.74,501.67 498.95,503.94 1379.74,503.94
5V0 on Internal Plane 2 (split plane): 531.89,452.88 533.5,446.44 534.47,439.88 534.8,433.25 534.47,426.62 533.5,420.05 531.89,413.62 529.65,407.37 526.81,401.37 523.4,395.67 519.45,390.34 514.99,385.43 510.07,380.97 504.74,377.01 499.05,373.6 493.05,370.76 486.8,368.53 480.36,366.92 473.8,365.94 467.17,365.62 460.54,365.94 453.97,366.92 447.54,368.53 441.29,370.76 435.29,373.6 429.59,377.01 424.26,380.97 419.35,385.43 414.89,390.34 410.93,395.67 407.52,401.37 404.68,407.37 402.45,413.62 400.84,420.05 399.86,426.62 399.54,433.25 399.86,439.88 400.84,446.44 402.45,452.88 402.75,453.72 531.59,453.72
VDD3.3V on Internal Plane 2 (split plane): 473.11,-366.08 479.68,-367.05 486.12,-368.66 492.37,-370.9 498.36,-373.74 504.06,-377.15 509.39,-381.1 514.31,-385.56 518.76,-390.48 522.72,-395.81 526.13,-401.5 528.97,-407.5 531.2,-413.75 532.82,-420.19 533.79,-426.75 534.11,-433.38 533.79,-440.01 532.98,-445.48 399.99,-445.48 399.18,-440.01 398.85,-433.38 399.18,-426.75 400.15,-420.19 401.76,-413.75 404,-407.5 406.84,-401.5 410.25,-395.81 414.2,-390.48 418.66,-385.56 423.58,-381.1 428.91,-377.15 434.6,-373.74 440.6,-370.9 446.85,-368.66 453.29,-367.05 459.85,-366.08 466.48,-365.75
no net on Internal Plane 2 (split plane): 1424.58,-366.15 1431.02,-367.76 1437.27,-369.99 1443.27,-372.83 1448.96,-376.24 1454.29,-380.2 1459.21,-384.65 1463.66,-389.57 1467.62,-394.9 1471.03,-400.6 1473.87,-406.6 1476.1,-412.84 1477.72,-419.28 1478.69,-425.85 1479.02,-432.48 1478.69,-439.11 1477.72,-445.67 1476.1,-452.11 1473.87,-458.36 1471.03,-464.36 1467.62,-470.05 1463.66,-475.38 1459.21,-480.3 1454.29,-484.76 1448.96,-488.71 1443.27,-492.12 1437.27,-494.96 1431.02,-497.2 1424.58,-498.81 1418.01,-499.78 1411.38,-500.11 1404.76,-499.78 1398.19,-498.81 1391.75,-497.2 1385.5,-494.96 1379.5,-492.12 1373.81,-488.71 1368.48,-484.76 1363.56,-480.3 1359.1,-475.38 1355.15,-470.05 1351.74,-464.36 1348.9,-458.36 1347.29,-453.84 1413.7,-453.84 1415.65,-453.45 1417.31,-452.35 1418.41,-450.69 1418.8,-448.74 1418.8,-365.29
no net on Internal Plane 2 (split plane): 1418.15,500.55 1424.72,499.58 1431.16,497.97 1437.41,495.73 1443.41,492.89 1449.1,489.48 1454.43,485.53 1459.35,481.07 1463.8,476.15 1467.76,470.82 1471.17,465.13 1474.01,459.13 1476.24,452.88 1477.86,446.44 1478.83,439.88 1479.16,433.25 1478.83,426.62 1477.86,420.05 1476.24,413.62 1474.01,407.37 1471.17,401.37 1467.76,395.67 1463.8,390.34 1459.35,385.43 1454.43,380.97 1449.1,377.01 1443.41,373.6 1437.41,370.76 1431.16,368.53 1424.72,366.92 1418.15,365.94 1415.9,365.83 1415.9,458.82 1415.51,460.77 1414.41,462.42 1412.75,463.53 1410.8,463.92 1351.31,463.92 1351.88,465.13 1355.29,470.82 1359.25,476.15 1363.7,481.07 1368.62,485.53 1373.95,489.48 1379.64,492.89 1385.64,495.73 1391.89,497.97 1398.33,499.58 1404.9,500.55 1411.53,500.88
5V0 on Internal Plane 2 (split plane): 1405.7,365.9 1404.9,365.94 1398.33,366.92 1391.89,368.53 1385.64,370.76 1379.64,373.6 1373.95,377.01 1368.62,380.97 1363.7,385.43 1359.25,390.34 1355.29,395.67 1351.88,401.37 1349.04,407.37 1346.81,413.62 1345.19,420.05 1344.22,426.62 1343.89,433.25 1344.22,439.88 1345.19,446.44 1346.81,452.88 1347.11,453.72 1405.7,453.72
no net on Internal Plane 2 (split plane): 528.97,-459.26 526.13,-465.26 522.72,-470.96 518.76,-476.29 514.31,-481.21 509.39,-485.66 504.06,-489.62 498.36,-493.03 492.37,-495.87 486.12,-498.1 479.68,-499.71 473.11,-500.69 466.48,-501.01 459.85,-500.69 453.29,-499.71 446.85,-498.1 440.6,-495.87 434.6,-493.03 428.91,-489.62 423.58,-485.66 418.66,-481.21 414.2,-476.29 410.25,-470.96 406.84,-465.26 404,-459.26 402.72,-455.68 530.25,-455.68
VAA3.3V on Internal Plane 2 (split plane): 1408.6,-443.65 1344.75,-443.65 1344.08,-439.11 1343.75,-432.48 1344.08,-425.85 1345.05,-419.28 1346.67,-412.84 1348.9,-406.6 1351.74,-400.6 1355.15,-394.9 1359.1,-389.57 1363.56,-384.65 1368.48,-380.2 1373.81,-376.24 1379.5,-372.83 1385.5,-369.99 1391.75,-367.76 1398.19,-366.15 1404.76,-365.17 1408.6,-364.98
no net on Internal Plane 2 (split plane): 473.8,500.55 480.36,499.58 486.8,497.97 493.05,495.73 499.05,492.89 504.74,489.48 510.07,485.53 514.99,481.07 519.45,476.15 523.4,470.82 526.81,465.13 527.39,463.92 406.95,463.92 407.52,465.13 410.93,470.82 414.89,476.15 419.35,481.07 424.26,485.53 429.59,489.48 435.29,492.89 441.29,495.73 447.54,497.97 453.97,499.58 460.54,500.55 467.17,500.88

## Keep-outs
Keep-Out Layer:
  pour cut-out: 513.36,55.23 507.12,53.34 497,47.93 488.12,40.64 480.84,31.77 475.43,21.65 472.1,10.67 470.97,-0.76 472.1,-12.18 475.43,-23.16 480.84,-33.29 488.12,-42.16 497,-49.44 507.12,-54.85 513.36,-56.75 513.36,-56.74 571.13,-57.1 572.14,-56.96 586.17,-51.15 598.23,-41.9 607.47,-29.85 613.29,-15.82 615.27,-0.76 613.29,14.3 607.47,28.34 598.23,40.39 586.17,49.64 572.14,55.45 571.13,55.58 571.01,55.23 513.36,55.23
  pour cut-out: 1365.94,-55.7 1372.18,-53.81 1382.3,-48.4 1391.18,-41.11 1398.46,-32.24 1403.87,-22.12 1407.2,-11.14 1408.33,0.29 1407.2,11.71 1403.87,22.69 1398.46,32.82 1391.18,41.69 1382.3,48.97 1372.18,54.38 1365.94,56.28 1365.94,56.27 1308.38,56.63 1307.37,56.49 1293.34,50.68 1281.28,41.43 1272.04,29.38 1266.22,15.35 1264.24,0.29 1266.22,-14.77 1272.04,-28.81 1281.28,-40.86 1293.34,-50.11 1307.37,-55.92 1308.38,-56.05 1308.5,-55.69 1365.94,-55.69
  lines w3.94: -202.35,-462.6 ccw(c-162.98,-462.6) -162.98,-501.97 1451.19,-501.97 ccw(c1451.19,-462.6) 1490.56,-462.6 1490.56,462.6 ccw(c1451.19,462.6) 1451.19,501.97 -162.98,501.97 ccw(c-162.98,462.6) -202.35,462.6 -202.35,-462.6

## Other copper
Top Layer:
  region net VAA3.3V: 1118.25,114.65 1092.87,64.96 1118.25,64.96 1118.25,114.65
Bottom Layer:
  region net DGND: 74.92,464.2 74.92,373.48 192.52,373.48 192.52,402.88 111.88,402.88 111.88,464.2 74.92,464.2
  region net DGND: 1015.33,324.11 1015.33,291.11 1240.86,291.11 1240.86,324.11 1015.33,324.11
  region net DGND: 80.14,-319.51 80.14,-464.83 116.08,-464.83 116.08,-407.71 183.28,-407.71 183.28,-370.75 116.08,-370.75 116.08,-319.51 80.14,-319.51
  region net DGND: -134.53,-288.08 -134.53,-356.48 23.46,-356.48 23.46,-288.08 -134.53,-288.08
  region net DGND: -138.03,346.95 -138.03,297.14 78.82,297.14 78.82,346.95 -138.03,346.95
Internal Plane 1 (plane layer: these items are gaps in the copper):
  region: 943.32,44.23 943.32,-51.03 1066.71,-51.03 1066.71,44.23 943.32,44.23
  lines w9.84: -169.78,-480.05 1468,-480.05 1468,3.82 1295.3,3.82 1295.3,-187.59 1119.5,-187.59 1119.5,-130.93 943.41,-130.93 943.41,-36 1038.34,58.94 1038.34,261.06 1286.4,261.06 1286.4,6.31 1468.61,6.31 1468.61,484.62 -169.78,484.62 -169.78,-480.05
  lines w10: 963,-121.18 963,-21.77 1038.8,54.02 1038.8,249.53 1287.2,249.53 1287.2,-183.72 1256.37,-183.72 1256.37,-184.25 1132.05,-184.25 1132.05,-121.18 963,-121.18
Internal Plane 2 (plane layer: these items are gaps in the copper):
  circle w9.84: c467.17,433.25 r72.57
  circle w9.84: c1411.38,-432.48 r72.57
  circle w9.84: c466.48,-433.38 r72.57
  circle w9.84: c1411.53,433.25 r72.57
  lines w10: -136.1,163.31 727.7,163.31 846.26,281.88 1410.8,281.88 1410.8,458.82 -136.1,458.82 -136.1,163.31 ; -134.26,-450.58 -134.26,152.35 729.02,152.35 849.62,272.95 1407.83,272.95 1407.83,136.04 999.42,136.04 999.42,-450.58 -134.26,-450.58 ; 1011.16,-448.74 1011.16,124.29 1413.7,124.29 1413.7,-448.74 1011.16,-448.74

## Silkscreen, mask and mechanical layers (free items; w line width, h text height)
Top Overlay:
  lines w9.84: 774.9,203.38 798.51,179.77 824.08,205.34 774.9,205.34 774.9,203.38
  lines w10: -90.1,-257.88 343.18,-257.88 343.18,-139.77 -90.1,-139.77 -90.1,-257.88 ; -90.1,-139.53 343.18,-139.53 343.18,-21.39 -90.1,-21.39 -90.1,-139.53 ; 126.08,-257.56 342.75,-257.56 342.75,-21.39 126.08,-21.39 126.08,-257.56
  text "XPCAM" at -25.96,183.36 h100
  text "1V4" at 42.96,70.14 h100
  text "M" at 184.42,-125.39 h68.9
  text "C" at 186.9,-245.02 h70.87
Bottom Overlay:
  lines w9.84: 891.26,-248.78 994.35,-248.78 994.35,-132.22 891.26,-132.22 891.26,-248.78
  text "XPCAM" at 636.32,187.37 h100
  text "1V4" at 568.46,97.83 h100
Drill Drawing:
  lines w1: 545.68,0 545.71,0 ; 1333.08,0 1333.11,0 ; 1411.82,-433.07 1411.85,-433.07 ; 1490.56,-501.97 1490.59,-501.97 ; -202.35,501.97 -202.32,501.97 ; 466.94,433.07 466.97,433.07 ; 1411.82,433.07 1411.85,433.07 1411.82,433.07 ; 1490.56,501.97 1490.59,501.97 1490.56,501.97
  lines w10: -202.35,551.97 -202.35,905.52 ; 457.29,855.52 -202.35,855.52 ; 466.94,483.07 466.94,790.28 ; 545.68,50 545.68,654.4 ; 752.56,740.28 466.94,740.28 ; 753.7,604.4 545.68,604.4 ; 830.93,855.52 1490.56,855.52 ; 1125.06,604.4 1333.08,604.4 ; 1126.2,740.28 1411.82,740.28 ; 1333.08,50 1333.08,654.4 ; 1411.82,483.07 1411.82,790.28 ; 1461.82,-433.07 1709.21,-433.07 ; 1461.82,433.07 1709.21,433.07 ; 1490.56,551.97 1490.56,905.52 ; 1540.56,-501.97 1896.85,-501.97 ; 1540.56,501.97 1896.85,501.97 ; 1659.21,-73.82 1659.21,-433.07 ; 1659.21,61.18 1659.21,433.07 ; 1846.85,62.45 1846.85,-501.97 ; 1846.85,197.45 1846.85,501.97 ; -202.35,855.52 -102.35,880.52 -102.35,830.52 -202.35,855.52 ; 466.94,740.28 566.94,765.28 566.94,715.28 466.94,740.28 ; 545.68,604.4 645.68,629.4 645.68,579.4 545.68,604.4 ; 1333.08,604.4 1233.08,579.4 1233.08,629.4 1333.08,604.4 ; 1411.82,740.28 1311.82,715.28 1311.82,765.28 1411.82,740.28 ; 1490.56,855.52 1390.56,830.52 1390.56,880.52 1490.56,855.52 ; 1659.21,-433.07 1634.21,-333.07 1684.21,-333.07 1659.21,-433.07 ; 1659.21,433.07 1684.21,333.07 1634.21,333.07 1659.21,433.07 ; 1846.85,-501.97 1821.85,-401.97 1871.85,-401.97 1846.85,-501.97 ; 1846.85,501.97 1871.85,401.97 1821.85,401.97 1846.85,501.97
  text "43.0mm" at 487.29,818.02 h50
  text "24.0mm" at 782.56,702.78 h50
  text "20.0mm" at 783.7,566.9 h50
  text "25.5mm" at 1701.5,92.45 h50
  text "22.0mm" at 1522.09,-43.82 h50